# Altium PCB Combinational_Logic_Fuctions.PcbDoc
Units mm, origin at the board's own origin, x right, y up, seen from the top; angles counter-clockwise.
Board outline 171 x 101.5 mm, 2 copper layers (Top Layer, Bottom Layer); 57 components, 94 nets, 362 pads, 37 vias.
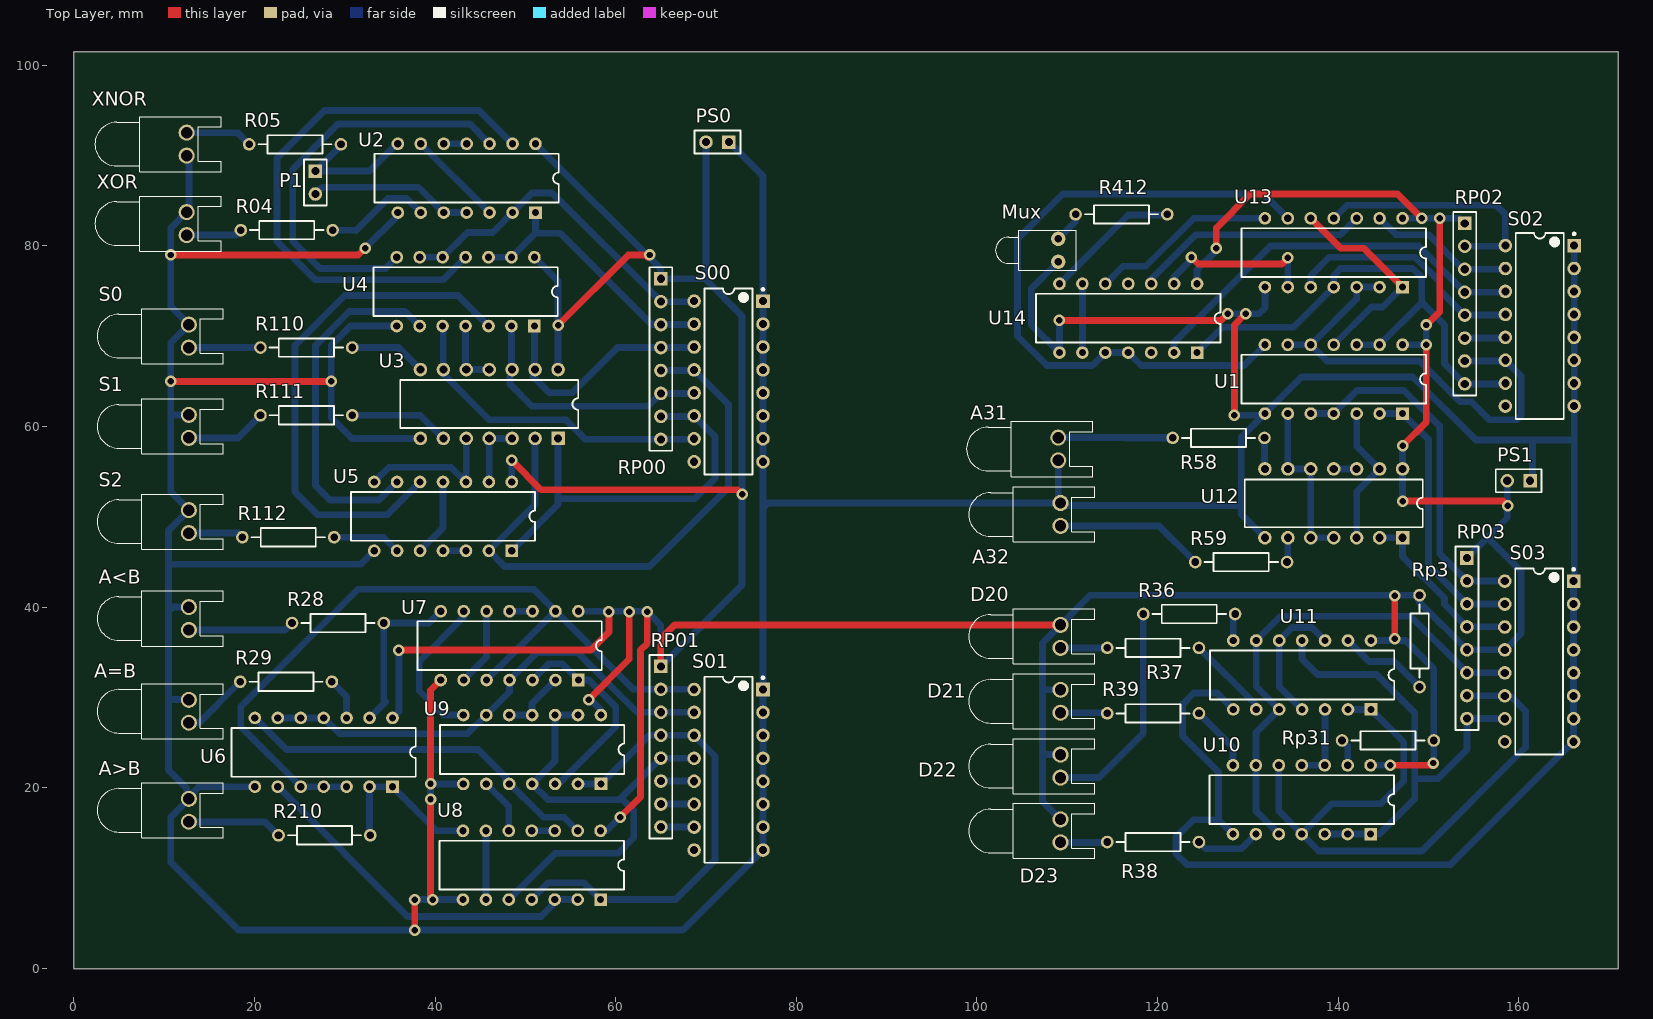
[diagram p0: Top Layer view]
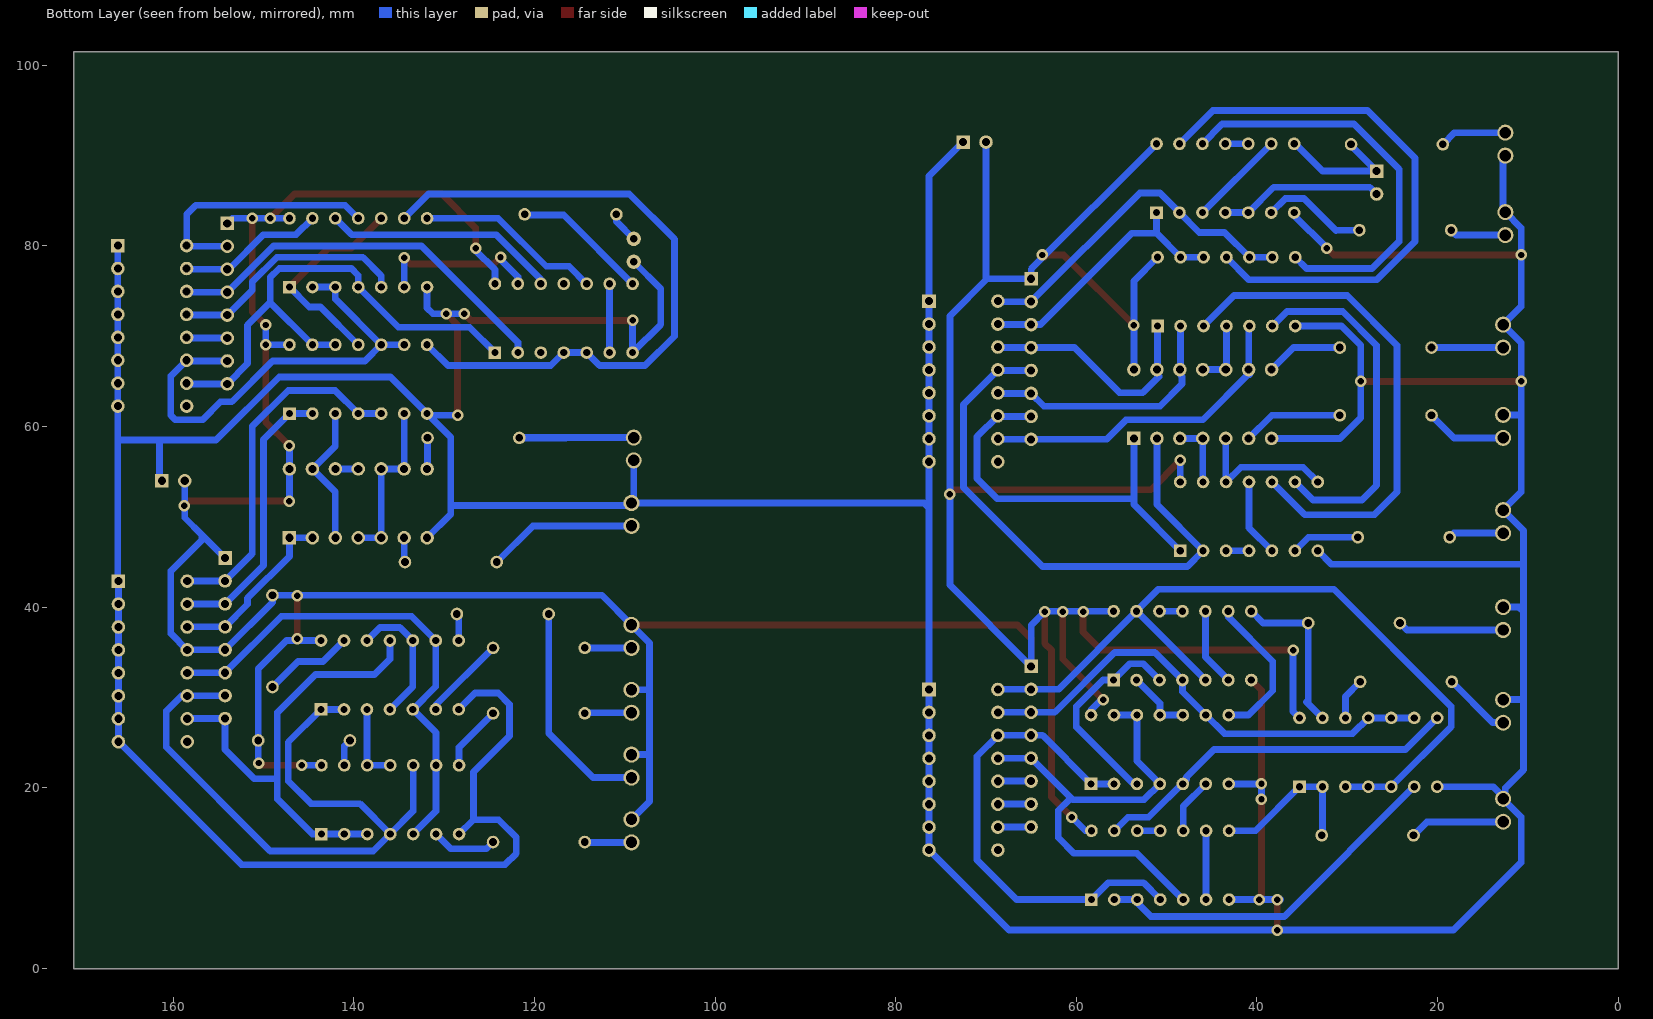
[diagram p1: Bottom Layer view, seen from below]

## Layer stack, top to bottom
Top Solder: solder mask 0.0102, Solder Resist, Dk 3.5
Top Layer: signal copper 0.0356
Dielectric1: dielectric 0.32, FR-4, Dk 4.8
Bottom Layer: signal copper 0.0356
Bottom Solder: solder mask 0.0102, Solder Resist, Dk 3.5

## Board outline
0,0 0,101.5 171,101.5 171,0

## Design rules (kind name [scope] priority, off if disabled: settings)
AssemblyTestPointUsage [All] p1: valid=2
Clearance [All] p1: gap=0.254
FabricationTestPointUsage TestPointUsage [All] p1: valid=2 allowmultiple=FALSE
FabricationTestpoint Testpoint [All] p1: side=3 testpointundercomponent=TRUE minsize=1.016 maxsize=2.54 preferedsize=1.524 minholesize=0 maxholesize=1.016 preferedholesize=0.813 testpointgrid=0.025 allowsidetop=TRUE allowsidebottom=TRUE usegrid=TRUE gridtolerance=0
MinimumSolderMaskSliver [All] p1: minsoldermaskwidth=0.1
PolygonConnect [All] p1: connectstyle=Relief reliefconductorwidth=0.254 reliefentries=4 polygonreliefangle="90 Angle" airgapwidth=0.254
RoutingVias [All] p1: holewidth=0.711 width=1.27 viastyle="Through Hole" minholewidth=0.711 minwidth=1.27 maxholewidth=0.711 maxwidth=1.27
SilkToSolderMaskClearance SilkToSolderMaskClearance_LED1 [IsPad vs HasFootprint('LED-1')] p1: minsilkscreentomaskgap=0.06 clearancetoexposedcopper=TRUE
SilkToSolderMaskClearance SilkscreenOverComponentPads [IsPad] p2: minsilkscreentomaskgap=0.15 clearancetoexposedcopper=TRUE
SolderMaskExpansion [All] p1: expansion=0.102
Width [All] p1: maxlimit=1 minlimit=0.254 preferedwidth=0.75
25 further rules are at their usual default settings.

## Components (designator, comment, footprint, x,y, rotation, side; value= is the part's Value field where it differs from the comment)
A31 "LED0" LED-0 109,57.52 r90 top
A32 "LED0" LED-0 109.25,50.27 r270 top
A<B "LED0" LED-0 12.75,38.75 r270 top
A=B "LED0" LED-0 12.75,28.48 r270 top
A>B "LED0" LED-0 12.75,17.52 r270 top
D20 "LED0" LED-0 109.25,36.77 r270 top
D21 "LED0" LED-0 109.25,29.59 r270 top
D22 "LED0" LED-0 109.25,22.41 r270 top
D23 "LED0" LED-0 109.25,15.23 r270 top
Mux "LED0" LED-1 109,79.52 r180 top
P1 "Header 2" HDR1X2 26.75,88.29 r270 top
PS0 "Header 2" HDR1X2 72.54,91.5 r180 top
PS1 "Header 2" HDR1X2 161.25,54 r180 top
R04 "1K" AXIAL-0.4 23.58,81.75 r0 top
R05 "1K" AXIAL-0.4 24.5,91.25 r0 top
R28 "1K" AXIAL-0.4 29.25,38.25 r180 top
R29 "1K" AXIAL-0.4 23.5,31.75 r0 top
R36 "1K" AXIAL-0.4 123.5,39.25 r180 top
R37 "1K" AXIAL-0.4 119.5,35.5 r180 top
R38 "1K" AXIAL-0.4 119.5,14 r180 top
R39 "1K" AXIAL-0.4 119.5,28.25 r180 top
R58 "1K" AXIAL-0.4 126.75,58.75 r0 top
R59 "1K" AXIAL-0.4 129.25,45 r0 top
R110 "1K" AXIAL-0.4 25.75,68.75 r0 top
R111 "1K" AXIAL-0.4 25.75,61.25 r0 top
R112 "1K" AXIAL-0.4 23.75,47.75 r0 top
R210 "1K" AXIAL-0.4 27.75,14.75 r180 top
R412 "1K" AXIAL-0.4 116,83.5 r0 top
RP00 "Header 8" HDR1X8 65,76.37 r270 top
RP01 "Header 8" HDR1X8 65,33.45 r270 top
RP02 "Header 8" HDR1X8 154,82.5 r270 top
Rp3 "1K" AXIAL-0.4 149,36.25 r270 top
RP03 "Header 8" HDR1X8 154.25,45.45 r270 top
Rp31 "1K" AXIAL-0.4 145.5,25.25 r180 top
S0 "LED0" LED-0 12.75,70.02 r270 top
S00 "SW-DIP8" DIP-16 72.5,65 r180 top
S1 "LED0" LED-0 12.75,60.02 r270 top
S01 "SW-DIP8" DIP-16 72.5,22 r180 top
S2 "LED0" LED-0 12.75,49.48 r270 top
S02 "SW-DIP8" DIP-16 162.31,71.15 r180 top
S03 "SW-DIP8" DIP-16 162.25,34 r180 top
U1 "MC54HC00AJ" 632-08 139.5,65.25 r180 top
U2 "MC54HC00AJ" 632-08 43.5,87.5 r180 top
U3 "MC74HC86N" 646-06 46,62.5 r180 top
U4 "MC54HC00AJ" 632-08 43.38,74.94 r180 top
U5 "MC54HC00AJ" 632-08 40.88,50.06 r180 top
U6 "MC54HC27J" 632-08 27.67,23.94 r180 top
U7 "MC54HC10J" 632-08 48.25,35.75 r180 top
U8 "MC54HC10J" 632-08 50.71,11.44 r180 top
U9 "MC54HC00AJ" 632-08 50.75,24.25 r180 top
U10 "MC54HC10J" 632-08 135.96,18.69 r180 top
U11 "MC54HC10J" 632-08 136,32.5 r180 top
U12 "MC74HC10N" 646-06 139.5,51.5 r180 top
U13 "MC54HC10J" 632-08 139.5,79.25 r180 top
U14 "MC54HC20J" 632-08 116.75,72 r180 top
XNOR "LED0" LED-0 12.5,91.27 r90 top
XOR "LED0" LED-0 12.5,82.48 r270 top

## Footprints (in the part's own frame and the unit in brackets; to place one, negate y for a bottom-side part, rotate by r counter-clockwise, add the part's x,y. Pads: shape width x height; smd on the part's side, far side on the other; paste and mask are expansions set on the pad)
632-08 [mm] "DIP; 14 Leads; Row Spacing 7.62 mm; Pitch 2.54 mm"
  rect 1.4x1.4 hole 0.8: 1(-7.62,3.81)
  round 1.4 hole 0.8: 2(-5.08,3.81) 3(-2.54,3.81) 4(0,3.81) 5(2.54,3.81) 6(5.08,3.81) 7(7.62,3.81) 8(7.62,-3.81) 9(5.08,-3.81) 10(2.54,-3.81) 11(0,-3.81) 12(-2.54,-3.81) 13(-5.08,-3.81) 14(-7.62,-3.81)
  silkscreen extent -10.2,-2.7 10.2,2.7
646-06 [mm] "DIP; 14 Leads; Row Spacing 7.62 mm; Pitch 2.54 mm"
  rect 1.5x1.5 hole 0.9: 1(-7.62,3.81)
  round 1.5 hole 0.9: 2(-5.08,3.81) 3(-2.54,3.81) 4(0,3.81) 5(2.54,3.81) 6(5.08,3.81) 7(7.62,3.81) 8(7.62,-3.81) 9(5.08,-3.81) 10(2.54,-3.81) 11(0,-3.81) 12(-2.54,-3.81) 13(-5.08,-3.81) 14(-7.62,-3.81)
  silkscreen extent -9.85,-2.65 9.85,2.65
AXIAL-0.4 [mm] "Axial Device, Thru-Hole; 2 Leads; 0.4 in Pin Spacing"
  round 1.4 hole 0.85: 1(-5.08,0) 2(5.08,0)
  silkscreen extent -4.06,-1.02 4.06,1.02
DIP-16 [mm] "DIP; 16 Leads; Row Spacing 7.62 mm; Pitch 2.54 mm"
  rect 1.5x1.5 hole 0.9: 1(-3.81,-8.89)
  round 1.5 hole 0.9: 2(-3.81,-6.35) 3(-3.81,-3.81) 4(-3.81,-1.27) 5(-3.81,1.27) 6(-3.81,3.81) 7(-3.81,6.35) 8(-3.81,8.89) 9(3.81,8.89) 10(3.81,6.35) 11(3.81,3.81) 12(3.81,1.27) 13(3.81,-1.27) 14(3.81,-3.81) 15(3.81,-6.35) 16(3.81,-8.89)
  silkscreen extent -3.94,-10.31 2.65,10.3, body extent -3.6,-10.28 3.6,10.28, height 5.08
HDR1X2 [mm] "Connector; Header; 2 Position"
  rect 1.5x1.5 hole 0.9: 1(0,0)
  round 1.5 hole 0.9: 2(2.54,0)
  silkscreen extent -1.27,-1.27 3.81,1.27
HDR1X8 [mm] "Connector; Header; 8 Position"
  rect 1.5x1.5 hole 0.9: 1(0,0)
  round 1.5 hole 0.9: 2(2.54,0) 3(5.08,0) 4(7.62,0) 5(10.16,0) 6(12.7,0) 7(15.24,0) 8(17.78,0)
  silkscreen extent -1.27,-1.27 19.05,1.27
LED-0 [mil] "LED; 2 Leads"
  round 70 hole 50: 1(50,0) 2(-50,0)
  silkscreen extent -120,-150 120,400
LED-1 [mm] "LED; 2 Leads"
  round 1.6 hole 0.8: 1(0,-1.27) 2(0,1.27)
  silkscreen extent -2,-2.2 6.95,2.2

## Part data
A31 A32 A<B A=B A>B D20 D21 D22 D23 Mux S0 S1 S2 XNOR XOR: "Typical INFRARED GaAs LED"
P1 PS0 PS1: "Header, 2-Pin"
R04 R05 R28 R29 R36 R37 R38 R39 R58 R59 R110 R111 R112 R210 R412 Rp3 Rp31: library part Res2, "Resistor"
RP00 RP01 RP02 RP03: "Header, 8-Pin"
S00 S01 S02 S03: "4009 Series DIP Switch, Raised actuator"
U1 U2 U4 U5 U9: "Quad 2-Input NAND Gate"
U3: "Quad 2-Input XOR Gate"
U6: "Triple 3-Input NOR Gate"
U7 U8 U10 U11 U12 U13: "Triple 3-Input NAND Gate"
U14: "Dual 4-Input NAND Gate"

## Via types
v1: diameter 1.27, hole 0.711, Top Layer to Bottom Layer, 37 vias

## Nets (pads, with @x,y where several pads share a name; then routed paths per layer and width w, separated by ;. In a path a pad name is that pad's centre, name@x,y a point inside that pad or via, vN(x,y) a via of type N, cw(c..) or ccw(c..) an arc to the next point about the centre after c; other vN are vias at no path point)
A01: RP00.3 S00.15 U2.1 U4.12 U4.13 | length 30.4
  Bottom Layer w0.75: U4.12 U4.13 51.12,81.41 ; U2.1 51.12,81.41 ; S00.15 68.63,71.29 RP00.3 63.96,71.29 53.84,81.41 51.12,81.41
A11: RP00.4 S00.14 U3.13 U4.1 | length 26.3
  Bottom Layer w0.75: U4.1 51,65.73 50.83,65.56 52.64,63.75 55.21,63.75 60.21,68.75 RP00.4 68.63,68.75 S00.14
A12: RP00.5 S00.13 U3.2 U5.2 | length 63.8
  Bottom Layer w0.75: U3.2 51.08,51.37 U5.2 47.71,44.5 63.75,44.5 72.5,53.25 72.5,62.46 S00.13 68.63,66.21 RP00.5
A21: RP01.4 S01.14 U8.1 U8.4 U9.1 U9.2 | length 53.5
  Bottom Layer w0.75: U8.4 52.58,9.5 56.46,9.5 U8.1 66.63,7.63 71,12 71,23.5 S01.14 68.67,25.83 RP01.4 63.76,25.83 U9.1 U9.2
A31: R58.2 U12.8 | length 3.5
  Bottom Layer w0.75: R58.2 131.83,55.36 U12.8
A32: R59.2 U12.6 | length 2.7
  Bottom Layer w0.75: R59.2 134.42,45.09 U12.6
A41: RP03.7 S03.11 U10.4 U10.10 U11.1 U11.2 | length 75.9
  Bottom Layer w0.75: U10.10 133.42,17.42 U10.4 ; U11.2 U11.1 147.25,25.06 147.25,20.75 144.75,18.25 139.33,18.25 U10.4 ; RP03.7 158.42,30.21 S03.11 159.06,30.19 160.75,28.5 160.75,24.5 149.25,13 137.84,13 U10.4
A42: RP03.8 S03.10 U10.1 U10.2 U10.3 U11.11 | length 52.9
  Bottom Layer w0.75: U11.11 136,34.25 137.71,32.54 144.25,32.54 148.46,28.33 148.46,21 ; U10.3 U10.2 U10.1 144.59,14.88 148.46,18.75 148.46,21 ; S03.10 158.42,27.67 RP03.8 154.25,24.25 151,21 148.46,21
A<B: R28.1 U6.13 U7.8 | length 18.1
  Bottom Layer w0.75: U6.13 34.5,29.5 34.33,29.67 R28.1 39.32,38.25 U7.8
A=B: A=B.1 R29.1 | length 7.8
  Bottom Layer w0.75: A=B.1@12.5,27.25 13.92,27.25 R29.1
A>B: R210.1 U6.1 U6.2 U8.8 | length 17.8
  Bottom Layer w0.75: R210.1 32.75,14.83 U6.2 U6.1 40.17,15.25 U8.8
B01: RP00.2 S00.16 U2.2 U4.9 U4.10 | length 38.3
  Bottom Layer w0.75: U4.9 U4.10 43.59,81.5 46.39,81.5 U2.2 50.75,85.86 52.97,85.86 RP00.2 68.63,73.83 S00.16
B11: RP00.6 S00.12 U3.12 U4.2 | length 28.5
  Bottom Layer w0.75: U4.2 48.46,65.73 48.29,65.56 48.29,64.71 50.75,62.25 63.58,62.25 RP00.6 68.63,63.67 S00.12
B12: RP00.7 S00.11 U3.1 U5.1 | length 44.5
  Bottom Layer w0.75: U5.1 53.62,51.37 53.62,52 ; U3.1 53.62,52 ; RP00.7 68.63,61.13 S00.11 71,58.88 71,54.25 68.75,52 53.62,52
B21: RP01.2 S01.16 U6.3 U6.4 U6.5 U7.5 U7.13 | length 87.6
  Bottom Layer w0.75: U6.3 U6.4 U6.5 18.5,26.76 18.5,29 31.5,42 50.89,42 U7.13 ; U7.5 U7.13 ; S01.16 68.67,30.91 RP01.2 61.98,30.91 U7.13
B22: RP01.3 S01.15 U6.9 U6.10 U6.11 U7.4 U9.9 | length 54.1
  Bottom Layer w0.75: U6.9 U6.10 U6.11 29.42,26 43.61,26 U9.9 48.25,30.64 U7.4 51.31,35 55.75,35 62.38,28.37 RP01.3 68.67,28.37 S01.15
CIN: RP00.8 S00.10 U3.9 U4.5 | length 36.7
  Bottom Layer w0.75: U3.9@40.84,65.73 U3.9@40.84,66.31 ; U4.5 40.92,71.05 U3.9 40.92,65.83 46,60.75 54.5,60.75 56.66,58.59 RP00.8 68.63,58.59 S00.10
D11: RP03.4 S03.14 U12.1 U12.2 | length 19.6
  Bottom Layer w0.75: U12.2 U12.1 147.12,45.63 151.75,41 151.75,40.33 RP03.4 158.42,37.83 S03.14
D12: RP03.3 S03.15 U1.1 U1.2 | length 30.8
  Bottom Layer w0.75: U1.2 U1.1 150,58.56 150,44.62 RP03.3 154.27,40.35 S03.15
D13: RP03.2 S03.16 U1.4 U1.5 | length 39.5
  Bottom Layer w0.75: U1.5 U1.4 142.06,64 147.25,64 151.25,60 151.25,55.5 151.25,45.91 RP03.2 158.42,42.91 S03.16
D20: R37.1 U11.6 | length 9.4
  Bottom Layer w0.75: R37.1 130.92,29.16 U11.6
D21: R39.1 U10.8 | length 7.3
  Bottom Layer w0.75: R39.1 128.34,24.49 U10.8
D22: R36.1 U11.8 | length 3
  Bottom Layer w0.75: U11.8 128.38,39.05 R36.1
D23: R38.1 U10.6 | length 7.3
  Bottom Layer w0.75: R38.1 125.33,13.25 129.25,13.25 U10.6
D30: RP02.2 S02.16 U13.11 | length 28
  Bottom Layer w0.75: U13.11 140.94,84.5 157.5,84.5 158.5,83.5 S02.16 158.42,79.96 RP02.2
D31: RP02.3 S02.15 U13.13 | length 16.3
  Bottom Layer w0.75: U13.13 146.39,81.25 150,81.25 153.83,77.42 RP02.3 158.42,77.42 S02.15
D32: RP02.4 S02.14 U14.2 | length 44.4
  Bottom Layer w0.75: U14.2 121.83,69.33 132.5,80 148.88,80 RP02.4 158.42,74.88 S02.14
D33: RP02.5 S02.13 U13.5 | length 26.9
  Bottom Layer w0.75: U13.5 136.96,76.71 139,78.75 148.5,78.75 151.25,76 151.25,75.09 RP02.5 158.42,72.34 S02.13
EN/DIN: RP03.6 S03.12 U10.5 U10.9 U11.5 U11.9 | length 55.8
  Bottom Layer w0.75: U10.5 130.88,17.42 U10.9 130.88,26.11 U11.5 130.92,31.23 U11.9 133.61,39 148,39 RP03.6 158.42,32.75 S03.12
GND: A31.2 A32.2 A<B.2 A=B.2 A>B.2 Mux.2 PS0.1 PS1.1 S00.1 S0.2 S00.2 S00.3 S00.4 S00.5 S00.6 S00.7 S00.8 S01.1 S01.2 S1.2 S01.3 S01.4 S01.5 S01.6 S01.7 S01.8 S02.1 S2.2 S02.2 S02.3 S02.4 S02.5 S02.6 S02.7 S02.8 S03.1 S03.2 S03.3 S03.4 S03.5 S03.6 S03.7 S03.8 U1.7 U2.7 U3.7 U4.7 U5.7 U6.7 U7.7 U8.7 U9.7 U10.7 U11.7 U12.7 U13.7 U14.7 XNOR.2 XOR.2 | length 707.1
  Top Layer w0.75: v1(10.75,65) v1(28.5,65) ; v1(10.75,79) 31.5,79 v1(32.25,79.75) ; v1(37.75,4.25) v1(37.75,7.63) ; v1(39.5,18.75) 39.5,7.88 v1(39.75,7.63) ; v1(39.5,20.44) 39.5,30.81 U7.7 ; v1(109.13,71.75) 127,71.75 v1(127.75,72.5) ; v1(128.5,61.25) 128.5,71.25 v1(129.75,72.5)
  Bottom Layer w0.75: 10.5,33.25 10.5,44.75 ; A=B.2@12.5,29.79 10.54,29.79 10.5,29.75 ; A<B.2@12.5,40.02 11.02,40.02 10.5,39.5 10.5,29.75 ; A>B.2 10.75,16.79 10.75,11.75 18.25,4.25 v1(37.75,4.25) 67.45,4.25 S01.8 S01.7 S01.6 S01.5 S01.4 S01.3 S01.2 S01.1 ; S1.2 10.79,61.29 10.75,61.25 ; XNOR.2@12.75,89.98 12.75,84 XOR.2 10.75,82 v1(10.75,79) 10.75,73.29 S0.2 10.75,69.29 v1(10.75,65) 10.75,61.25 ; U6.7 13.86,20.13 12.5,18.77 12.5,20 10.5,22 10.5,29.75 ; v1(32.25,79.75) 35.88,83.38 U2.7 ; U5.7 31.76,44.75 10.5,44.75 ; U4.7 30.63,71.13 28.5,69 v1(28.5,65) 28.5,61 30.81,58.69 U3.7 ; v1@37.38,7.63 v1(37.75,7.63) v1(39.75,7.63) U8.7 ; v1@39.5,18.5 v1(39.5,18.75) v1(39.5,20.44) U9.7 ; PS0.1 76.31,87.73 S00.1 S00.2 S00.3 S00.4 S00.5 S00.6 S00.7 S00.8 76.31,51 ; 76.31,24.64 76.31,51 ; A31.2 109,51.79 A32.2 ; v1@109,72 109.13,71.87 v1(109.13,71.75) U14.7 106,71.32 106,75.25 Mux.2 ; v1(127.75,72.5) v1(129.75,72.5) 131.25,72.5 131.88,73.13 U13.7 ; U10.7 126.75,16.47 ; U11.7 126.57,30.5 124,30.5 122.75,29.25 122.75,25.75 126.75,21.75 126.75,16.47 ; v1(128.5,61.25) U1.7@131.69,61.25 ; U12.7 129.25,50.32 129.25,51.25 ; PS1.1 161.5,54.25 161.5,58.5 ; S02.1 S02.2 S02.3 S02.4 S02.5 S02.6 S02.7 S02.8 166.12,58.5 ; 10.5,44.75 10.5,48.5 S2.2 10.75,52.75 10.75,61.25 ; 76.31,51 76.85,51.54 A32.2 ; A32.2 109.54,51.25 129.25,51.25 ; 126.75,16.47 123.97,16.47 122,14.5 122,12.75 123.25,11.5 152.45,11.5 S03.8 S03.7 S03.6 S03.5 S03.4 S03.3 S03.2 S03.1 166.12,42.95 166.12,58.5 ; 129.25,51.25 129.25,58.81 U1.7@131.69,61.25 ; U1.7@131.69,61.25 U1.7 135.94,65.5 148.25,65.5 155.25,58.5 161.5,58.5 ; 161.5,58.5 166.12,58.5
NetA31_1: A31.1 R58.1 | length 17.9
  Bottom Layer w0.75: A31.1 121.63,58.79 R58.1 116.5,58.75
NetA32_1: A32.1 R59.1 | length 16.6
  Bottom Layer w0.75: A32.1 120.17,49 R59.1
NetA<B_1: A<B.1 R28.2 | length 12
  Bottom Layer w0.75: A<B.1@12.5,37.48 23.4,37.48 R28.2
NetA>B_1: A>B.1 R210.2 | length 10.8
  Bottom Layer w0.75: A>B.1@12.5,16.23 21.19,16.23 R210.2
NetD20_1: D20.1 R37.2 | length 5.2
  Bottom Layer w0.75: D20.1 R37.2
NetD21_1: D21.1 R39.2 | length 5.2
  Bottom Layer w0.75: D21.1 114.35,28.32 R39.2
NetD22_1: D22.1 R36.2 | length 24.4
  Bottom Layer w0.75: D22.1 113.5,21.14 118.42,26.06 R36.2
NetD23_1: D23.1 R38.2 | length 5.2
  Bottom Layer w0.75: D23.1 114.38,13.96 R38.2
NetMux_1: Mux.1 R412.1 | length 3.5
  Bottom Layer w0.75: Mux.1 110.92,82.71 R412.1
NetP1_1: P1.1 R05.2 U2.8 | length 14.7
  Bottom Layer w0.75: R05.2 29.58,91.12 P1.1 32.75,88.29 U2.8@35.96,91.5
NetP1_2: P1.2 U2.4 U2.5 | length 18.2
  Bottom Layer w0.75: P1.2 27.5,86.5 38.15,86.5 U2.5 U2.4
NetR04_1: R04.1 XOR.1 | length 6.3
  Bottom Layer w0.75: XOR.1@12.54,81.25 XOR.1 17.96,81.21 R04.1
NetR04_2: R04.2 U2.6 | length 11.9
  Bottom Layer w0.75: R04.2 31.21,81.75 31.25,81.71 34.79,85.25 36.86,85.25 U2.6
NetR05_1: R05.1 XNOR.1 | length 7.5
  Bottom Layer w0.75: XNOR.1 18.13,92.54 R05.1
NetR29_2: R29.2 U6.12 | length 4.8
  Bottom Layer w0.75: R29.2 30.21,30.12 U6.12 U6.12@30.33,27.87
NetR110_1: R110.1 S0.1 | length 7.9
  Bottom Layer w0.75: S0.1 R110.1
NetR111_1: R111.1 S1.1 | length 9
  Bottom Layer w0.75: S1.1 18.17,58.75 R111.1
NetR112_1: R112.1 S2.1 | length 6.1
  Bottom Layer w0.75: S2.1 18.21,48.21 R112.1
NetR412_2: R412.2 U14.8 | length 15.1
  Bottom Layer w0.75: U14.8 116.75,83.43 121.01,83.43 R412.2
NetRP01_5: RP01.5 S01.13 U8.5 U9.4 U9.12 U9.13 | length 53.5
  Bottom Layer w0.75: U8.5 53.29,12.75 58.75,12.75 60.25,12.75 62,14.5 62,17.5 60.71,18.79 60.71,19 ; U9.13 U9.12 53.29,22.98 U9.4 52.5,18.69 60.4,18.69 60.71,19 ; S01.13 68.67,23.29 RP01.5 60.71,19
NetRP01_6: RP01.6 S01.12 | length 3.7
  Bottom Layer w0.75: RP01.6 68.67,20.75 S01.12
NetRP01_7: RP01.7 S01.11 | length 3.7
  Bottom Layer w0.75: RP01.7 68.67,18.21 S01.11
NetRP01_8: RP01.8 S01.10 | length 3.7
  Bottom Layer w0.75: RP01.8 68.67,15.67 S01.10
NetRP02_6: RP02.6 S02.12 | length 4.5
  Bottom Layer w0.75: RP02.6 158.42,69.8 S02.12
NetRp3_2: Rp3.2 U11.13 | length 10
  Bottom Layer w0.75: U11.13 143.39,34 146.17,34 Rp3.2
NetRp31_2: Rp31.2 U10.13 | length 3
  Bottom Layer w0.75: Rp31.2 141.04,24.63 U10.13
NetU1_3: U1.3 U12.3 U12.13 | length 15.9
  Bottom Layer w0.75: U12.3 142.04,52.77 U12.13 142.04,57.85 U1.3
NetU1_6: U1.6 U12.4 U12.5 U12.9 U12.10 | length 18.8
  Bottom Layer w0.75: U1.6 U12.9 U12.10 U12.5 U12.4
NetU1_8: U1.8 U13.9 U14.4 U14.5 | length 74.7
  Bottom Layer w0.75: U1.8 129.57,66.75 118.19,66.75 U14.4 U14.5 112.77,66.75 107.75,66.75 104.5,70 104.5,80.75 109.5,85.75 131.73,85.75 U13.9
NetU1_11: U1.11 U13.1 U13.10 | length 23.6
  Top Layer w0.75: U13.10 140.27,79.75 142.81,79.75 U13.1
  Bottom Layer w0.75: U1.11 143.69,73.25 144.93,73.25 U13.1
NetU2_3: U2.3 U2.9 | length 10.8
  Bottom Layer w0.75: U2.9 U2.3
NetU2_10: U2.10 U2.11 | length 2.5
  Bottom Layer w0.75: U2.10 U2.11
NetU2_12: U2.12 U4.8 | length 46
  Bottom Layer w0.75: U4.8 34.51,77.5 27.25,77.5 24.25,80.5 24.25,88.5 29.25,93.5 43.85,93.5 U2.12
NetU2_13: U2.13 U4.11 | length 62.7
  Bottom Layer w0.75: U4.11 40.88,76.25 26.75,76.25 22.5,80.5 22.5,89.75 27.75,95 44.89,95 U2.13
NetU3_3: U3.3 U3.4 U5.13 | length 7.4
  Bottom Layer w0.75: U5.13 46,53.91 U3.4 U3.3
NetU3_5: U3.5 U5.8 U5.12 | length 16.3
  Bottom Layer w0.75: U5.8 34.89,55.5 41.79,55.5 U5.12 43.46,53.91 U3.5
NetU3_10: U3.10 U3.11 U4.4 | length 7.4
  Bottom Layer w0.75: U3.10@43.38,66.31 U4.4 ; U3.10 U3.11
NetU4_3: U4.3 U5.10 | length 57.7
  Bottom Layer w0.75: U5.10 34.72,50.25 27,50.25 24.5,52.75 24.5,69 30,74.5 42.55,74.5 U4.3
NetU4_6: U4.6 U5.9 | length 39.8
  Bottom Layer w0.75: U5.9 33.805,51.875 28.375,51.875 26.75,53.5 26.75,69 30.5,72.75 36.68,72.75 U4.6
NetU5_3: U5.3 U5.4 | length 2.5
  Bottom Layer w0.75: U5.4 U5.3
NetU5_5: U5.5 U5.11 | length 8.7
  Bottom Layer w0.75: U5.5 40.88,48.79 U5.11
NetU6_6: U6.6 U8.2 U8.3 | length 40.2
  Bottom Layer w0.75: U6.6 36.97,5.75 51.75,5.75 53.25,7.25 U8.3 U8.2
NetU6_8: U6.8 U8.13 U9.5 | length 41.1
  Bottom Layer w0.75: U6.8 23.55,24.25 44.75,24.25 47.81,21.19 47.81,20.94 52,16.75 54.29,16.75 U8.13
NetU7_1: U7.1 U7.3 U9.3 | length 23.5
  Bottom Layer w0.75: U7.3 52.6,33.75 54.06,33.75 U7.1 57.06,31.94 60,29 60,26.75 53.69,20.44 U9.3
NetU7_2: U7.2 U9.10 U9.11 | length 7.5
  Bottom Layer w0.75: U9.10 U9.11 50.75,29.36 U7.2
NetU7_6: U7.6 U7.10 | length 8.7
  Bottom Layer w0.75: U7.6 45.71,34.48 U7.10
NetU7_9: U7.9 U9.8 | length 16.8
  Bottom Layer w0.75: U9.8 40.94,28.06 38.25,30.75 38.25,34 43.17,38.92 U7.9
NetU7_11: U7.11 U7.12 | length 2.5
  Bottom Layer w0.75: U7.11 U7.12
NetU8_6: U8.6 U8.9 | length 7.6
  Bottom Layer w0.75: U8.6 U8.9
NetU8_10: U8.10 U9.6 | length 6.2
  Bottom Layer w0.75: U9.6 48.17,17.94 U8.10
NetU8_11: U8.11 U8.12 | length 2.5
  Bottom Layer w0.75: U8.11 U8.12
NetU10_11: U10.11 U10.12 U11.3 | length 8.7
  Bottom Layer w0.75: U10.11 U10.12 138.54,22.54 U11.3
NetU11_4: U11.4 U11.10 U11.12 | length 14.9
  Bottom Layer w0.75: U11.4 133.46,31.23 U11.10 134.9,37.75 137.1,37.75 U11.12
NetU12_11: U12.11 U12.12 | length 2.5
  Bottom Layer w0.75: U12.11 U12.12
NetU13_6: U13.6 U14.13 | length 18.1
  Top Layer w0.75: v1(123.75,78.75) 124.5,78 133.75,78 v1(134.42,78.67)
  Bottom Layer w0.75: U14.13 121.83,76.58 v1@123.75,78.5 ; U13.6 v1(134.42,78.67) v1@134.5,78.75
NetU13_8: U13.8 U14.10 | length 20.7
  Bottom Layer w0.75: U14.10 116.15,77.75 118.69,77.75 124,83.06 U13.8
NetU13_12: U13.12 U14.12 | length 26
  Bottom Layer w0.75: U14.12 119.29,76.29 124.25,81.25 140.23,81.25 U13.12
NetU14_6: U14.6 U14.9 | length 7.6
  Bottom Layer w0.75: U14.6 U14.9
S0: R110.2 U3.8 | length 8.6
  Bottom Layer w0.75: R110.2 35.94,68.75 U3.8
S1: R111.2 U3.6 | length 11.2
  Bottom Layer w0.75: R111.2 38.36,61.25 U3.6
S2: R112.2 U5.6 | length 7.6
  Bottom Layer w0.75: R112.2 34.3,47.75 U5.6
S10: RP02.7 S02.11 U1.9 U1.10 U13.2 U13.3 | length 51.9
  Bottom Layer w0.75: U1.9 U1.10 ; U13.2 U13.3 142.04,74.14 U1.10 ; RP02.7 158.42,67.26 S02.11 160.25,65.59 160.25,61.25 159.75,60.75 156.75,60.75 154.75,62.75 153.5,62.75 148.98,67.27 138.75,67.27 U1.10
S11: RP02.8 S02.10 U1.12 U1.13 U13.4 U14.1 | length 57.3
  Bottom Layer w0.75: U14.1 127.18,71 135.06,71 U13.4 139.5,76.75 140.25,77.5 148.25,77.5 149.25,76.5 149.25,73.73 ; U1.12 U1.13 149.25,73.73 ; S02.10 158.42,64.72 RP02.8 151.75,66.97 151.75,71.23 149.25,73.73
VDD: D20.2 D21.2 D22.2 D23.2 PS0.2 PS1.2 RP00.1 RP01.1 RP02.1 RP03.1 Rp3.1 RP03.5 Rp31.1 S03.13 U1.14 U2.14 U3.14 U4.14 U5.14 U6.14 U7.14 U8.14 U9.14 U10.14 U11.14 U12.14 U13.14 U14.14 | length 507.4
  Top Layer w0.75: v1(36,35.25) 57.25,35.25 59.25,37.25 v1(59.25,39.5) ; v1(48.5,56.25) 51.75,53 73.5,53 v1(74,52.5) ; v1(53.62,71.22) 61.4,79 v1(63.75,79) v1@63.5,78.75 ; v1(57,29.75) 61.5,34.25 v1(61.5,39.5) ; U8.14@58.33,14.92 U8.14 ; v1(60.5,16.75) 62.75,19 62.75,35.25 63.5,36 v1(63.5,39.5) ; RP01.1 65,36.54 66.5,38.04 D20.2 ; v1(126.5,79.75) 126.5,82 130.25,85.75 146.56,85.75 v1(149.25,83.06) ; v1(145.75,22.5) 150.25,22.5 v1(150.5,22.75) ; v1(146.25,36.5) v1(146.25,41.25) ; v1(147.12,51.75) 158.25,51.75 v1(158.75,51.25) ; v1(147.12,57.88) 149.75,60.51 v1(149.75,69.06) ; v1(149.75,71.25) 151.25,72.75 v1(151.25,83.06)
  Bottom Layer w0.75: U6.14 36,28.46 v1(36,35.25) ; U5.14 v1(48.5,56.25) ; U4.14 53.62,76.13 v1(53.62,71.22) U3.14 ; U2.14 65,77.43 RP00.1 69.88,76.37 ; U7.14 63.44,39.56 v1(63.5,39.5) 65,38 RP01.1 74,42.45 v1(74,52.5) 74,72.25 69.88,76.37 ; v1@57.25,29.75 58.37,28.63 U9.14 ; U8.14 59,15.25 v1(60.5,16.75) ; PS0.2 70,76.49 69.88,76.37 ; D23.2 107.25,18.5 107.25,23.5 ; D22.2 107.43,23.68 107.25,23.5 ; D21.2 107.36,30.86 107.25,30.75 ; U14.14 124.37,77.37 126.5,79.5 v1(126.5,79.75) ; U10.14 v1(145.75,22.5) v1@146,22.5 ; U11.14 147.44,36.31 150.58,33.17 Rp31.1 v1@150.58,23.08 ; v1@147,51.5 147.12,51.62 v1(147.12,51.75) U12.14 v1(147.12,57.88) v1@147,58 ; U1.14 v1(149.75,69.06) v1(149.75,71.25) v1@149.75,71.5 ; U13.14 v1(149.25,83.06) v1(151.25,83.06) 153.44,83.06 RP02.1 ; RP03.1 156.8,48 ; PS1.2 158.71,49.91 156.8,48 ; 107.25,23.5 107.25,30.75 ; 107.25,30.75 107.25,36.04 D20.2 112.54,41.33 Rp3.1 149,40.54 RP03.5 158.42,35.29 S03.13 160.25,37.08 160.25,44 156.8,47.45 156.8,48
pads on no net: S00.9 S01.9 S02.9 S03.9 U14.3 U14.11

## Silkscreen, mask and mechanical layers (free items; w line width, h text height)
Mechanical 16:
  drawing of 1871 lines, arcs and shapes, not listed
  text "1" at 16.222,130.757 h1.78
  text "3" at 162.018,130.757 h1.78
  text "4" at 236.25,130.75 h1.78
  text "2" at 82,130.5 h1.78
  text "A" at 268.25,110.5 h1.78
  text "A" at -18.119,107.745 h1.78
  text "B" at -18.119,59.688 h1.78
  text "B" at 268.901,59.688 h1.78
  text "C" at -18.119,11.174 h1.78
  text "ENGINEER:" at 153.966,-25.834 h1.14
  text "TITLE:" at 192.066,-25.834 h1.14
  text "PCB DESIGNER:" at 153.966,-33.327 h1.14
  text "D" at -18.119,-36.832 h1.78
  text "D" at 268.901,-36.832 h1.78
  text "DATE:" at 153.966,-41.074 h1.14
  text "PART NO.:" at 192.066,-41.074 h1.14
  text "REV:" at 245.406,-41.074 h1.14
  text "Altium Limited" at 120.946,-43.614 h1.78
  text ".PRINT_DATE" at 155.236,-44.122 h1.78
  text "12a Rodborough Rd" at 120.946,-46.154 h1.78
  text "Frenchs Forest" at 120.946,-48.694 h1.78
  text "FILE NAME:" at 153.966,-48.694 h1.14
  text "DWG NO:" at 192.066,-48.694 h1.14
  text "SCALE:" at 245.406,-48.694 h1.14
  text "NSW 2086" at 120.946,-51.234 h1.78
  text ".PCB_FILE_NAME_NO_PATH" at 155.236,-51.742 h1.78
  text "1" at 16.222,-57.203 h1.78
  text "2" at 88.866,-57.203 h1.78
  text "3" at 162.018,-57.203 h1.78
  text "4" at 234.916,-57.203 h1.78